# Altium PCB JC1001-1.PcbDoc
Units mm, origin at the board's own origin, x right, y up, seen from the top; angles counter-clockwise.
Board outline 33.02 x 22.86 mm, 2 copper layers (Top Layer, Bottom Layer); 41 components, 25 nets, 113 pads, 12 vias.
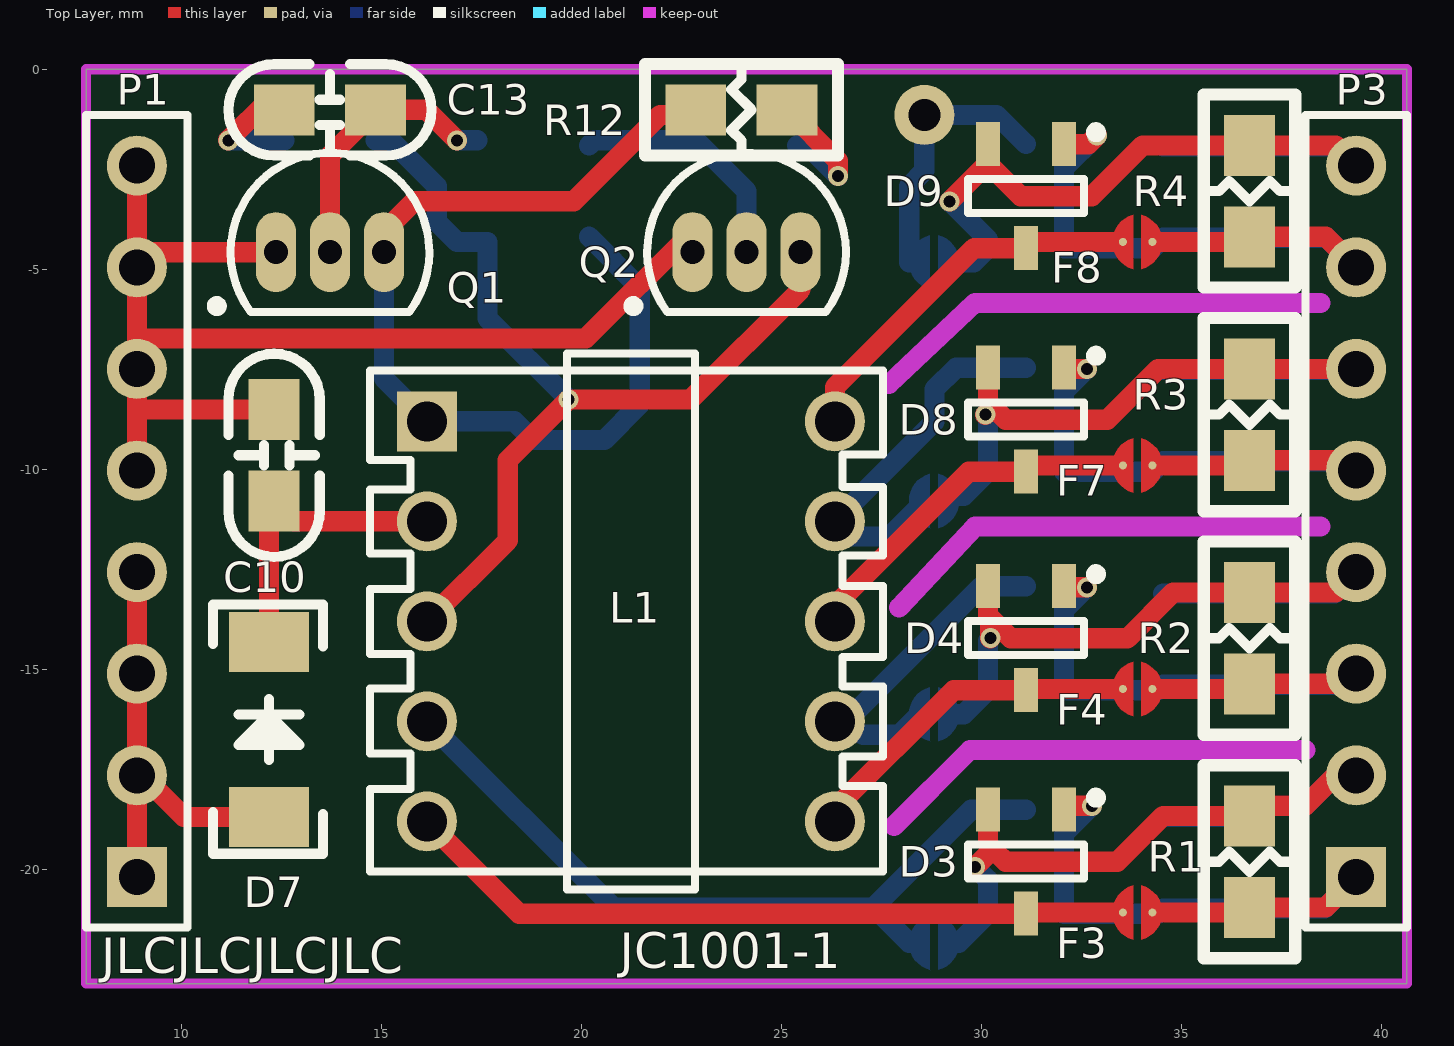
[diagram p0: Top Layer view]
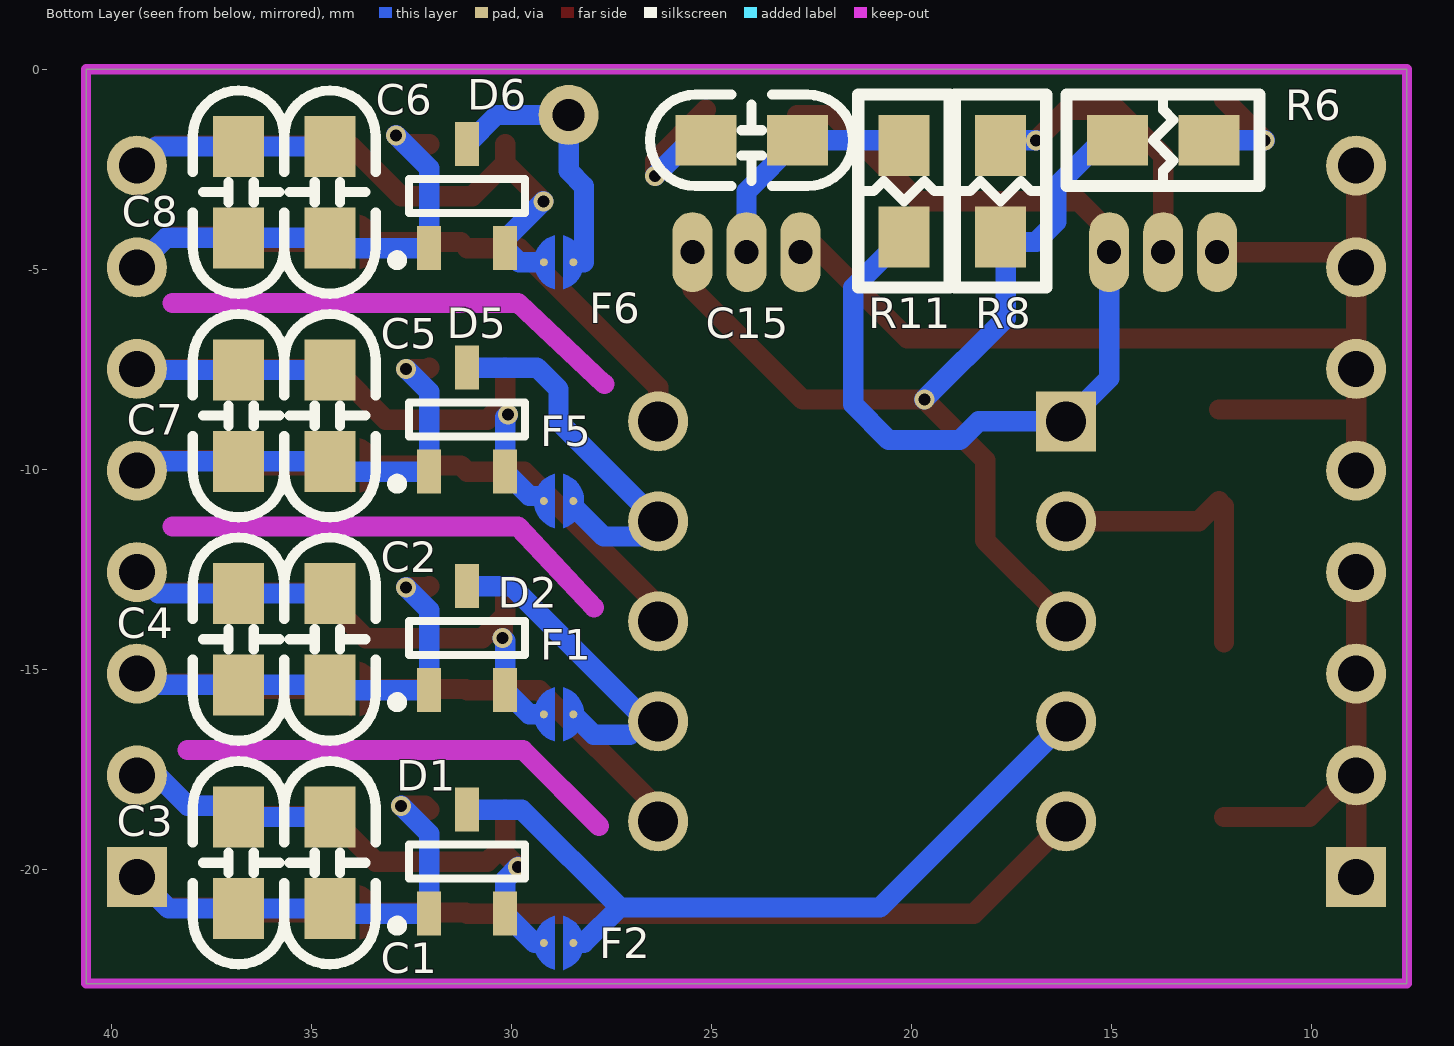
[diagram p1: Bottom Layer view, seen from below]

## Layer stack, top to bottom
Top Layer: signal copper 0.0356
Dielectric: dielectric 0.32, FR-4, Dk 4.8
Bottom Layer: signal copper 0.0356

## Board outline
7.62,-22.86 7.62,0 40.64,0 40.64,-22.86

## Design rules (kind name [scope] priority, off if disabled: settings)
Clearance [All] p1: gap=0.203
ComponentClearance [All] p1 off: gap=0.254 collisioncheckmode=3 verticalgap=0.254 showdistances=FALSE
Height [All] p1 off: minheight=0 maxheight=25.4 prefheight=12.7
HoleToHoleClearance [All] p1 off: gap=0.254 allowstackedmicrovias=TRUE
MinimumSolderMaskSliver [All] p1 off: minsoldermaskwidth=0.254
NetAntennae [All] p1 off: netantennaetolerance=0
PolygonConnect [All] p1: connectstyle=Relief reliefconductorwidth=0.254 reliefentries=4 polygonreliefangle="90 Angle"
RoutingVias [All] p1: holewidth=0.3 width=0.5 viastyle="Through Hole" minholewidth=0.3 minwidth=0.3 maxholewidth=2.54 maxwidth=3.81
SilkToSilkClearance [All] p1 off: silktosilkclearance=0.254
SilkscreenOverComponentPads [All] p1 off: minsilkscreentomaskgap=0.254
SolderMaskExpansion [All] p1: expansion=0.102
Width [All] p1: maxlimit=1.27 minlimit=0.203 preferedwidth=0.254 minimp=50.000000 maximp=50.000000 favimp=50.000000
21 further rules are at their usual default settings.

## Components (designator, comment, footprint, x,y, rotation, side; value= is the part's Value field where it differs from the comment)
C1 "10uF (106) ±10% 25V" C0805 34.544,-19.837 r90 bottom
C2 "10uF (106) ±10% 25V" C0805 34.544,-14.249 r90 bottom
C3 "100nF (104) ±10% 50V" C0805 36.83,-19.837 r270 bottom
C4 "100nF (104) ±10% 50V" C0805 36.83,-14.249 r270 bottom
C5 "10uF (106) ±10% 25V" C0805 34.544,-8.661 r90 bottom
C6 "10uF (106) ±10% 25V" C0805 34.544,-3.073 r90 bottom
C7 "100nF (104) ±10% 50V" C0805 36.83,-8.661 r270 bottom
C8 "100nF (104) ±10% 50V" C0805 36.83,-3.073 r270 bottom
C10 "100nF (104) ±10% 50V" C0805 12.319,-9.652 r270 top
C13 "2.2nF (222) ±10% 100V" C0805 13.716,-1.016 r180 top
C15 "2.2nF (222) ±10% 100V" C0805 24.003,-1.778 r0 bottom
D1 "BAV99" SOT-23-3L 31.115,-19.812 r270 bottom
D2 "BAV99" SOT-23-3L 31.115,-14.224 r270 bottom
D3 "BAV99" SOT-23-3L 31.115,-19.812 r90 top
D4 "BAV99" SOT-23-3L 31.115,-14.224 r90 top
D5 "BAV99" SOT-23-3L 31.115,-8.763 r270 bottom
D6 "BAV99" SOT-23-3L 31.115,-3.175 r270 bottom
D7 "1N4007" SMA 12.192,-16.51 r270 top
D8 "BAV99" SOT-23-3L 31.115,-8.763 r90 top
D9 "BAV99" SOT-23-3L 31.115,-3.175 r90 top
F1 "短路点" SCP-2 28.829,-16.129 r0 bottom
F2 "短路点" SCP-2 28.829,-21.844 r0 bottom
F3 "短路点" SCP-2 33.909,-21.082 r0 top
F4 "短路点" SCP-2 33.909,-15.494 r0 top
F5 "短路点" SCP-2 28.829,-10.795 r0 bottom
F6 "短路点" SCP-2 28.829,-4.826 r0 bottom
F7 "短路点" SCP-2 33.909,-9.906 r0 top
F8 "短路点" SCP-2 33.909,-4.318 r0 top
L1 "高频变压器" EPC13-11 23.241,-11.303 r0 top
P1 "HDR1X8" HDR1X8 8.89,-11.303 r90 top
P3 "HDR1X8" HDR1X8 39.37,-11.303 r90 top
Q1 "2SC1008Y" TO-92-3 13.716,-4.572 r270 top
Q2 "2SC1008Y" TO-92-3 24.13,-4.572 r270 top
R1 "47KΩ (4702) ±1%" R0805 36.703,-19.812 r90 top
R2 "47KΩ (4702) ±1%" R0805 36.703,-14.224 r90 top
R3 "47KΩ (4702) ±1%" R0805 36.703,-8.636 r90 top
R4 "47KΩ (4702) ±1%" R0805 36.703,-3.048 r90 top
R6 "210Ω (2100) ±1%" R0805 13.716,-1.778 r180 bottom
R8 "240KΩ (2403) ±1%" R0805 17.78,-3.048 r90 bottom
R11 "240KΩ (2403) ±1%" R0805 20.193,-3.048 r90 bottom
R12 "210Ω (2100) ±1%" R0805 24.003,-1.016 r180 top

## Footprints (in the part's own frame and the unit in brackets; to place one, negate y for a bottom-side part, rotate by r counter-clockwise, add the part's x,y. Pads: shape width x height; smd on the part's side, far side on the other; paste and mask are expansions set on the pad)
C0805 [mil]
  rect 60x50 smd: 1(-45,0) 2(45,0)
  silkscreen extent -100,-45 100,45, body extent -41,-26 41,26, height 22
EPC13-11 [mm]
  rect 1.5x1.5 hole 1: 1(-7.1,2.5)
  round 1.5 hole 1: 2(-7.1,0) 3(-7.1,-2.5) 4(-7.1,-5) 5(-7.1,-7.5) 6(3.1,-7.5) 7(3.1,-5) 8(3.1,-2.5) 9(3.1,0) 10(3.1,2.5)
  round 1.5 hole 0.8: 11(5.334,10.16)
  silkscreen extent -8.52,-9.2 4.3,4.2, body extent -8.55,-9.36 4.35,4.36, height 8
HDR1X8 [mm] "Connector; He"
  rect 1.5x1.5 hole 0.9: 1(-8.89,0)
  round 1.5 hole 0.9: 2(-6.35,0) 3(-3.81,0) 4(-1.27,0) 5(1.27,0) 6(3.81,0) 7(6.35,0) 8(8.89,0)
  silkscreen extent -10.16,-1.27 10.16,1.27
R0805 [mil]
  rect 60x50 smd: 1(-45,0) 2(45,0)
  silkscreen extent -95,-45 95,45, body extent -41,-26 41,26, height 22
SCP-2 [mm]
  round 0.2 smd: 1(-0.368,0) 2(0.368,0)
  Top Layer region: -0.114,-0.679 -0.384,-0.539 -0.57,-0.298 -0.636,0 -0.569,0.297 -0.382,0.537 -0.111,0.676 -0.111,0.676 -0.113,0.659
  Top Layer region: 0.095,0.676 0.365,0.536 0.551,0.295 0.617,-0.003 0.55,-0.3 0.363,-0.54 0.092,-0.679 0.092,-0.679 0.095,-0.662
SMA [mm]
  rect 1.5x2 smd: 1(2.184,0) 2(-2.184,0)
  silkscreen extent -3.13,-1.4 3.1,1.35, body extent -2.03,-1.02 2.03,1.02, height 1.71
SOT-23-3L [mm]
  rect 1.1x0.6 smd: 1(1.3,-0.95) 2(1.3,0.95) 3(-1.3,0)
  silkscreen extent -0.42,-1.88 1.72,1.45
TO-92-3 [mm] "TO, Flat Index; 3 In-Line, Axial Leads; Body Dia. 4.5mm; Leads 0.51 x"
  oval 2x1 hole 0.6: 1(0,-1.35) 2(0,0) 3(0,1.35)
  silkscreen extent -2.48,-2.95 1.5,2.48, body extent -2.5,-2.5 1.5,2.5, height 6.86

## Part data
C1 C2 C5 C6: library part "C贴片电容(C0805) 10uF (106) ±10% 25V", "0805X1"
C3 C4 C7 C8 C10: library part "C贴片电容(C0805) 100nF (104) ±10% 50V", "CL21B10"
C13 C15: library part "C贴片电容(C0805) 2.2nF (222) ±10% 100V", "CL21B22"
D1 D2 D3 D4 D5 D6 D8 D9: library part D贴片开关二极管(SOT-23-3L)
D7: library part "D贴片整流管(SMA) 1N4007"
F1 F2 F3 F4 F5 F6 F7 F8: library part F贴片跳线开关(SCP-2)
L1: library part "L直插变压器(EPC13-11) EPC13-15-5-20*3", "EPC13-1"
P1 P3: library part "P标准插针2.54间距(HDR?*?)  HDR1X8"
Q1 Q2: library part "Q直插三极管(TO-92-3) 2SC1008Y NPN"
R1 R2 R3 R4: library part "R贴片电阻(R0805) 47KΩ (4702) ±1%", "0805"
R6 R12: library part "R贴片电阻(R0805) 210Ω (2100) ±1%", "0805"
R8 R11: library part "R贴片电阻(R0805) 240KΩ (2403) ±1%", "0805"

## Via types
v1: diameter 0.5, hole 0.3, Top Layer to Bottom Layer, 12 vias

## Nets (pads, with @x,y where several pads share a name; then routed paths per layer and width w, separated by ;. In a path a pad name is that pad's centre, name@x,y a point inside that pad or via, vN(x,y) a via of type N, cw(c..) or ccw(c..) an arc to the next point about the centre after c; other vN are vias at no path point)
15V: C10.2 D7.2 L1.2 | length 7.4
  Top Layer w0.508: D7.2 C10.2@12.192,-10.922 ; C10.2 12.827,-11.303 L1.2
GND: C10.1 P1.5 P1.6 P1.7 P1.8 Q1.1 Q2.1 | length 29.9
  Top Layer w0.508: P1.5 8.89,-8.509 ; 8.89,-6.731 20.113,-6.731 22.78,-4.064 Q2.1 Q2.1@22.78,-4.779 ; P1.8 P1.7 P1.6 8.89,-8.509 ; P1.7@9.271,-4.572 Q1.1 ; C10.1 8.89,-8.509
GND1: C1.1 C3.2 D1.1 D3.1 F3.2 P3.1 R1.1 | length 16.7
  Top Layer w0.508: D3.1 32.162,-18.415 v1(32.766,-18.415) ; F3.2 36.576,-21.082 R1.1 38.608,-20.955 P3.1
  Bottom Layer w0.508: v1(32.766,-18.415) 32.065,-19.116 D1.1 C1.1@34.412,-21.112 ; C1.1 C3.2 38.583,-20.98 P3.1
GND2: C2.1 C4.2 D2.1 D4.1 F4.2 P3.3 R2.1 | length 15.6
  Top Layer w0.508: D4.1 32.095,-12.954 v1(32.639,-12.954) ; F4.2 R2.1@36.576,-15.494 ; R2.1 P3.3@39.116,-15.367
  Bottom Layer w0.508: v1(32.639,-12.954) 32.065,-13.528 D2.1 34.412,-15.524 C2.1 C4.2 39.091,-15.392 P3.3
GND3: C5.1 C7.2 D5.1 D8.1 F7.2 P3.5 R3.1 | length 15.6
  Top Layer w0.508: D8.1 32.095,-7.493 v1(32.639,-7.493) ; F7.2 R3.1@36.576,-9.906 ; R3.1 P3.5@39.116,-9.779
  Bottom Layer w0.508: v1(32.639,-7.493) 32.065,-8.067 D5.1 34.285,-10.063 C5.1 C7.2 39.141,-9.804 P3.5
GND4: C6.1 C8.2 D6.1 D9.1 F8.2 P3.7 R4.1 | length 17.1
  Top Layer w0.508: D9.1 32.669,-1.875 v1(32.893,-1.651) ; F8.2 R4.1@36.576,-4.318 ; R4.1 38.608,-4.191 P3.7
  Bottom Layer w0.508: v1(32.893,-1.651) 32.065,-2.479 D6.1 34.285,-4.475 C6.1 C8.2 38.633,-4.216 P3.7
JL1-1: D1.3 F2.1 L1.4 | length 19.4
  Bottom Layer w0.508: L1.4 20.793,-20.955 27.305,-20.955 ; F2.1 28.194,-21.844 27.305,-20.955 ; D1.3 29.748,-18.512 27.305,-20.955
JL1-2: D3.3 F3.1 L1.5 | length 18.4
  Top Layer w0.508: L1.5 18.45,-21.112 D3.3 31.145,-21.082 F3.1
JL2-1: D2.3 F1.1 L1.7 | length 7.8
  Bottom Layer w0.508: L1.7 26.623,-16.303 30.002,-12.924 D2.3 ; 27.051,-16.637 27.953,-16.637 F1.1
JL2-2: D4.3 F4.1 L1.6 | length 8.8
  Top Layer w0.508: L1.6 26.341,-18.49 29.307,-15.524 D4.3 31.145,-15.494 F4.1
JL3-1: D5.3 F5.1 L1.9 | length 9.4
  Bottom Layer w0.508: 28.461,-10.922 27.699,-11.684 26.722,-11.684 L1.9 28.829,-8.815 28.829,-8.001 29.367,-7.463 D5.3
JL3-2: D8.3 F7.1 L1.8 | length 9
  Top Layer w0.508: L1.8 26.341,-13.41 29.688,-10.063 D8.3 31.272,-9.906 F7.1
JL4-1: D6.3 F6.1 L1.11 | length 7
  Bottom Layer w0.5: L1.11 30.383,-1.143 D6.3
  Bottom Layer w0.508: F6.1 28.194,-4.826 28.194,-2.921 28.575,-2.54 L1.11
JL4-2: D9.3 F8.1 L1.10 | length 9.3
  Top Layer w0.508: L1.10 26.341,-7.949 29.815,-4.475 D9.3 ; D9.3@31.272,-4.318 F8.1
NetC13_1: C13.1 Q1.2 R8.2 | length 6.4
  Top Layer w0.508: Q1.2@13.716,-4.064 13.716,-2.159 C13.1 16.129,-1.016 v1(16.891,-1.778)
  Bottom Layer w0.508: v1(16.891,-1.778) R8.2@17.399,-1.778
NetC13_2: C13.2 R6.2 | length 2.8
  Top Layer w0.508: v1(11.176,-1.778) C13.2@12.192,-0.762
  Bottom Layer w0.508: v1(11.176,-1.778) R6.2
NetC15_1: C15.1 Q2.2 R11.2 | length 6
  Bottom Layer w0.508: R11.2 20.32,-1.778 C15.1 24.13,-3.048 Q2.2
NetC15_2: C15.2 R12.1 | length 3.5
  Top Layer w0.508: R12.1 26.416,-2.286 v1(26.416,-2.667)
  Bottom Layer w0.508: C15.2@25.4,-1.905 25.654,-1.905 v1(26.416,-2.667)
NetD7_1: D7.1 P1.1 P1.2 P1.3 P1.4 | length 11.4
  Top Layer w0.508: P1.1 P1.2 ; P1.4 P1.3 P1.2 ; D7.1 10.058,-18.694 9.017,-17.653 P1.2
NetL1_1: L1.1 Q1.3 R11.1 R12.2 | length 24.8
  Top Layer w0.508: Q1.3@15.066,-4.064 15.828,-3.302 19.812,-3.302 21.971,-1.143 R12.2@22.86,-1.143
  Bottom Layer w0.508: Q1.3@15.066,-4.064 15.066,-7.728 L1.1 18.328,-8.803 18.796,-9.271 20.574,-9.271 21.463,-8.382 21.463,-5.461 R11.1
NetL1_3: L1.3 Q2.3 R6.1 R8.1 | length 24.8
  Top Layer w0.254: L1.3 L1.3@16.423,-13.803
  Top Layer w0.508: L1.3 18.161,-11.783 18.161,-9.779 v1(19.685,-8.255) 22.733,-8.255 25.48,-5.508 Q2.3@25.48,-4.064
  Bottom Layer w0.508: R6.1 15.24,-1.778 16.383,-2.921 16.383,-3.81 16.891,-4.318 17.653,-4.318 17.653,-6.223 v1(19.685,-8.255)
VCC1: C1.2 C3.1 D1.2 D3.2 F2.2 P3.2 R1.2 | length 19.6
  Top Layer w0.508: v1(29.845,-19.939) 30.226,-19.558 30.353,-19.558 ; D3.2 30.165,-19.37 30.353,-19.558 ; P3.2 38.862,-17.653 38.1,-18.415 36.957,-18.415 R1.2 34.544,-18.669 33.401,-19.812 30.607,-19.812 30.353,-19.558
  Bottom Layer w0.508: F2.2 29.433,-21.844 D1.2 30.165,-20.259 v1(29.845,-19.939) ; C1.2 C3.1 37.109,-18.415 38.1,-18.415 38.862,-17.653 P3.2
VCC2: C2.2 C4.1 D2.2 D4.2 F1.2 P3.4 R2.2 | length 19
  Top Layer w0.508: D4.2 30.165,-13.655 30.226,-13.716 ; v1(30.226,-14.224) 30.226,-13.716 ; P3.4 38.862,-13.081 R2.2 34.798,-13.081 33.655,-14.224 30.734,-14.224 30.226,-13.716
  Bottom Layer w0.508: F1.2 29.56,-16.129 D2.2 30.165,-14.285 v1(30.226,-14.224) ; C2.2 C4.1 38.837,-13.106 P3.4
VCC3: C5.2 C7.1 D5.2 D8.2 F5.2 P3.6 R3.2 | length 18.4
  Top Layer w0.508: v1(30.099,-8.636) v1@30.165,-8.57 ; D8.2 30.165,-8.321 30.607,-8.763 33.147,-8.763 34.417,-7.493 R3.2 P3.6
  Bottom Layer w0.508: 29.21,-10.668 29.56,-10.668 D5.2 30.165,-8.702 v1(30.099,-8.636) ; C5.2 C7.1 39.345,-7.518 P3.6
VCC4: C6.2 C8.1 D6.2 D9.2 F6.2 P3.8 R4.2 | length 19.8
  Top Layer w0.508: v1(29.21,-3.302) D9.2@30.165,-2.347 ; D9.2 D9.2@30.165,-2.347 ; P3.8 38.862,-1.905 R4.2 34.036,-1.905 32.766,-3.175 30.988,-3.175 30.165,-2.352 D9.2@30.165,-2.347
  Bottom Layer w0.508: F6.2 29.814,-4.826 D6.2 30.165,-4.257 v1(29.21,-3.302) ; C6.2 C8.1 38.887,-1.93 P3.8

## Keep-outs
Keep-Out Layer:
  lines w0.254: 7.62,-22.86 40.64,-22.86 40.64,0 7.62,0 7.62,-22.86
  lines w0.5: 27.686,-7.874 29.845,-5.842 33.274,-5.842 38.481,-5.842 ; 27.813,-18.923 29.718,-17.018 29.972,-17.018 38.1,-17.018 ; 27.94,-13.462 29.845,-11.43 38.481,-11.43

## Silkscreen, mask and mechanical layers (free items; w line width, h text height)
Top Overlay:
  text "JC1001-1" at 20.955,-22.479 h0.89
  text "JLCJLCJLCJLC" at 8.001,-22.606 h0.89